# Altium PCB 四轴.PcbDoc
Units mil, origin at the board's own origin, x right, y up, seen from the top; angles counter-clockwise.
Board outline 3934.83 x 3935.71 mil, 2 copper layers (Top Layer, Bottom Layer); 73 components, 53 nets, 246 pads, 41 vias.
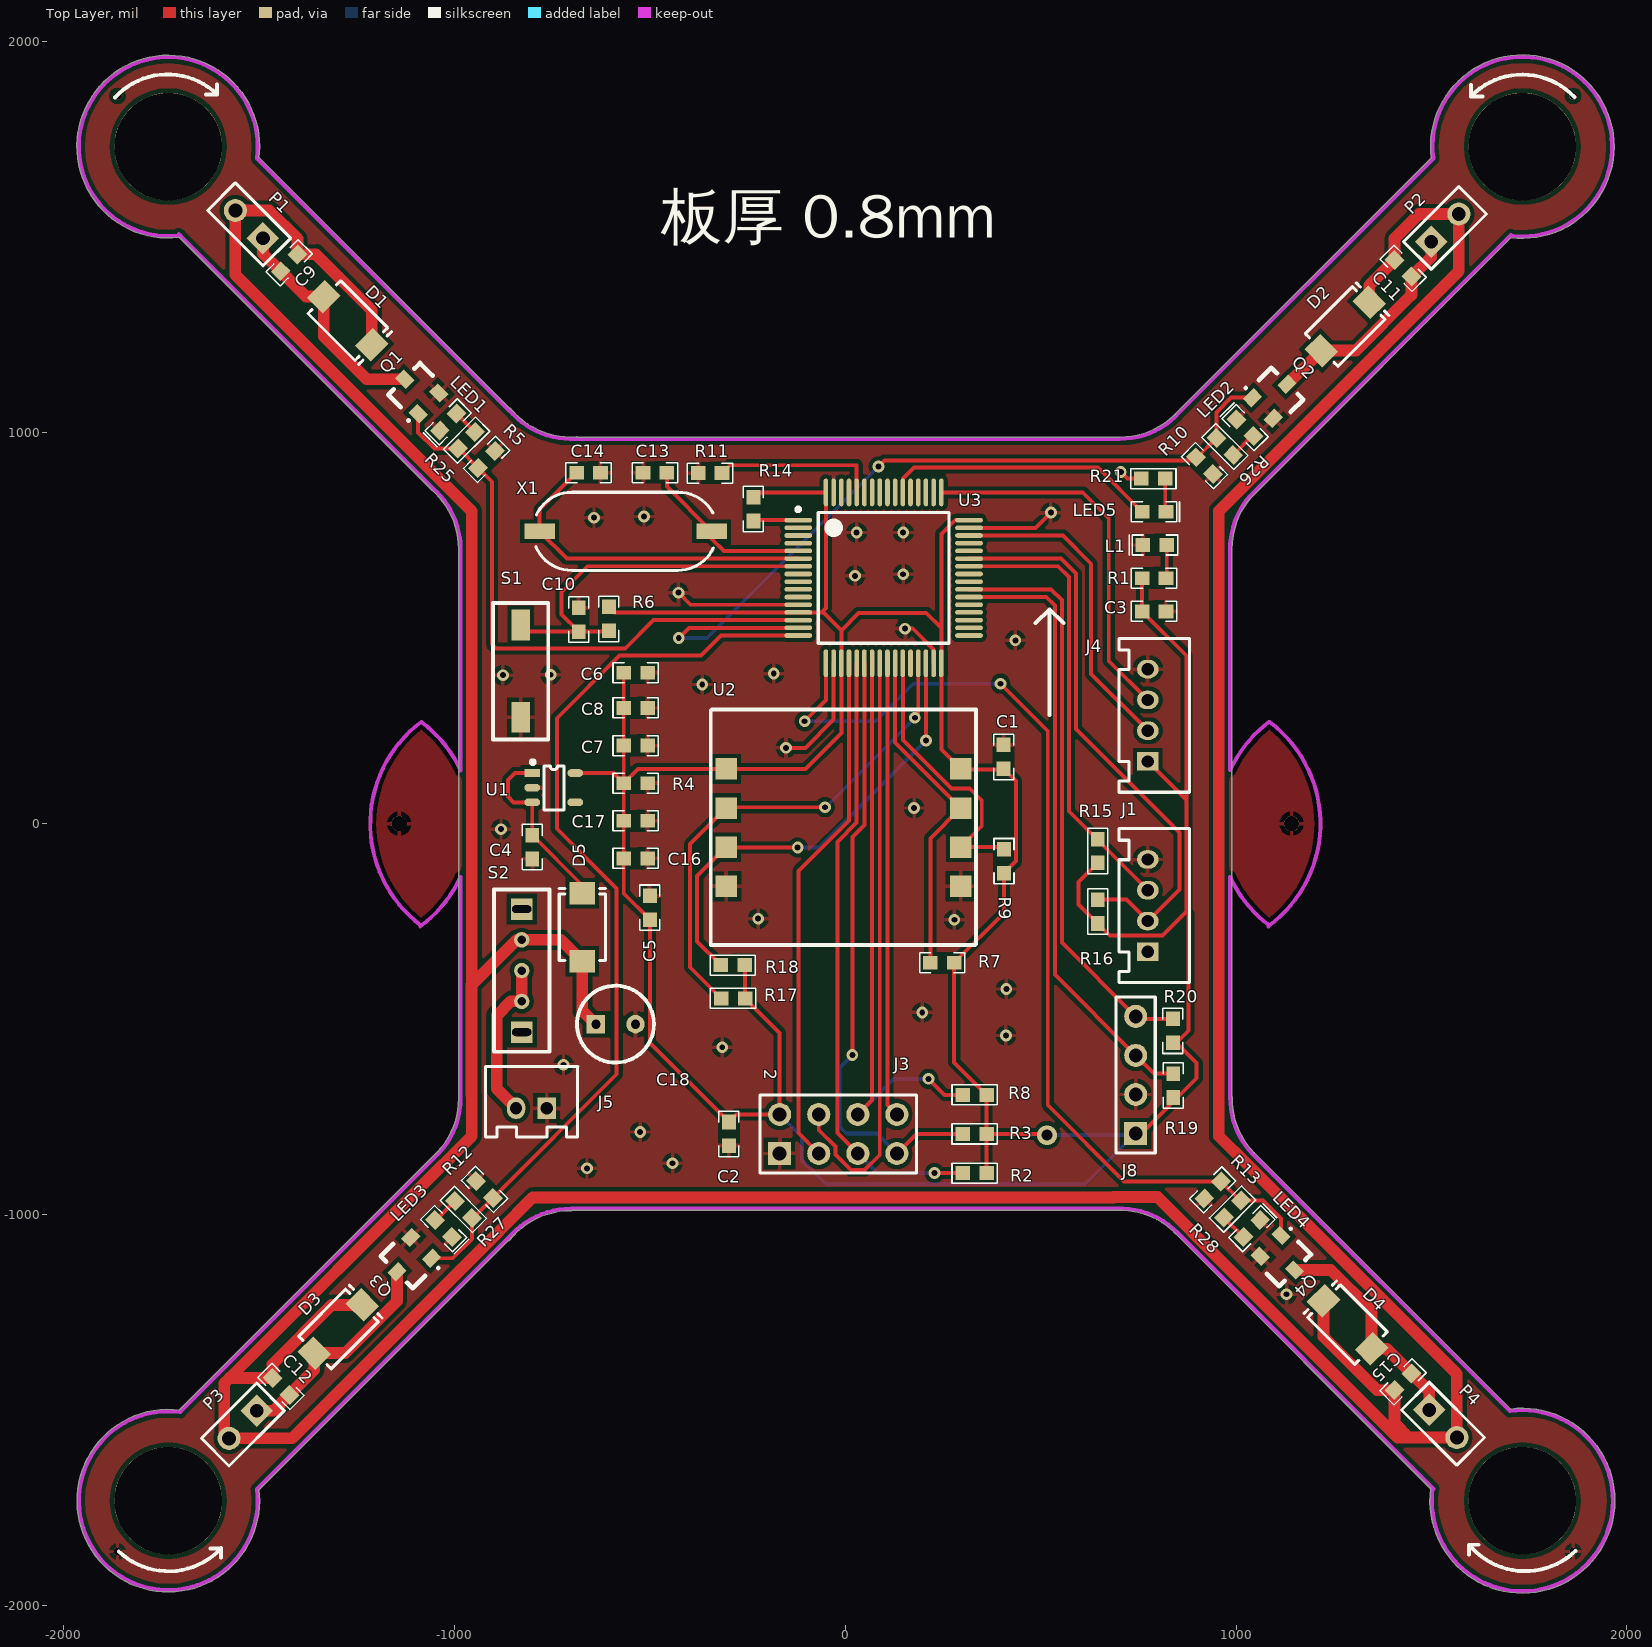
[diagram p0: Top Layer view]
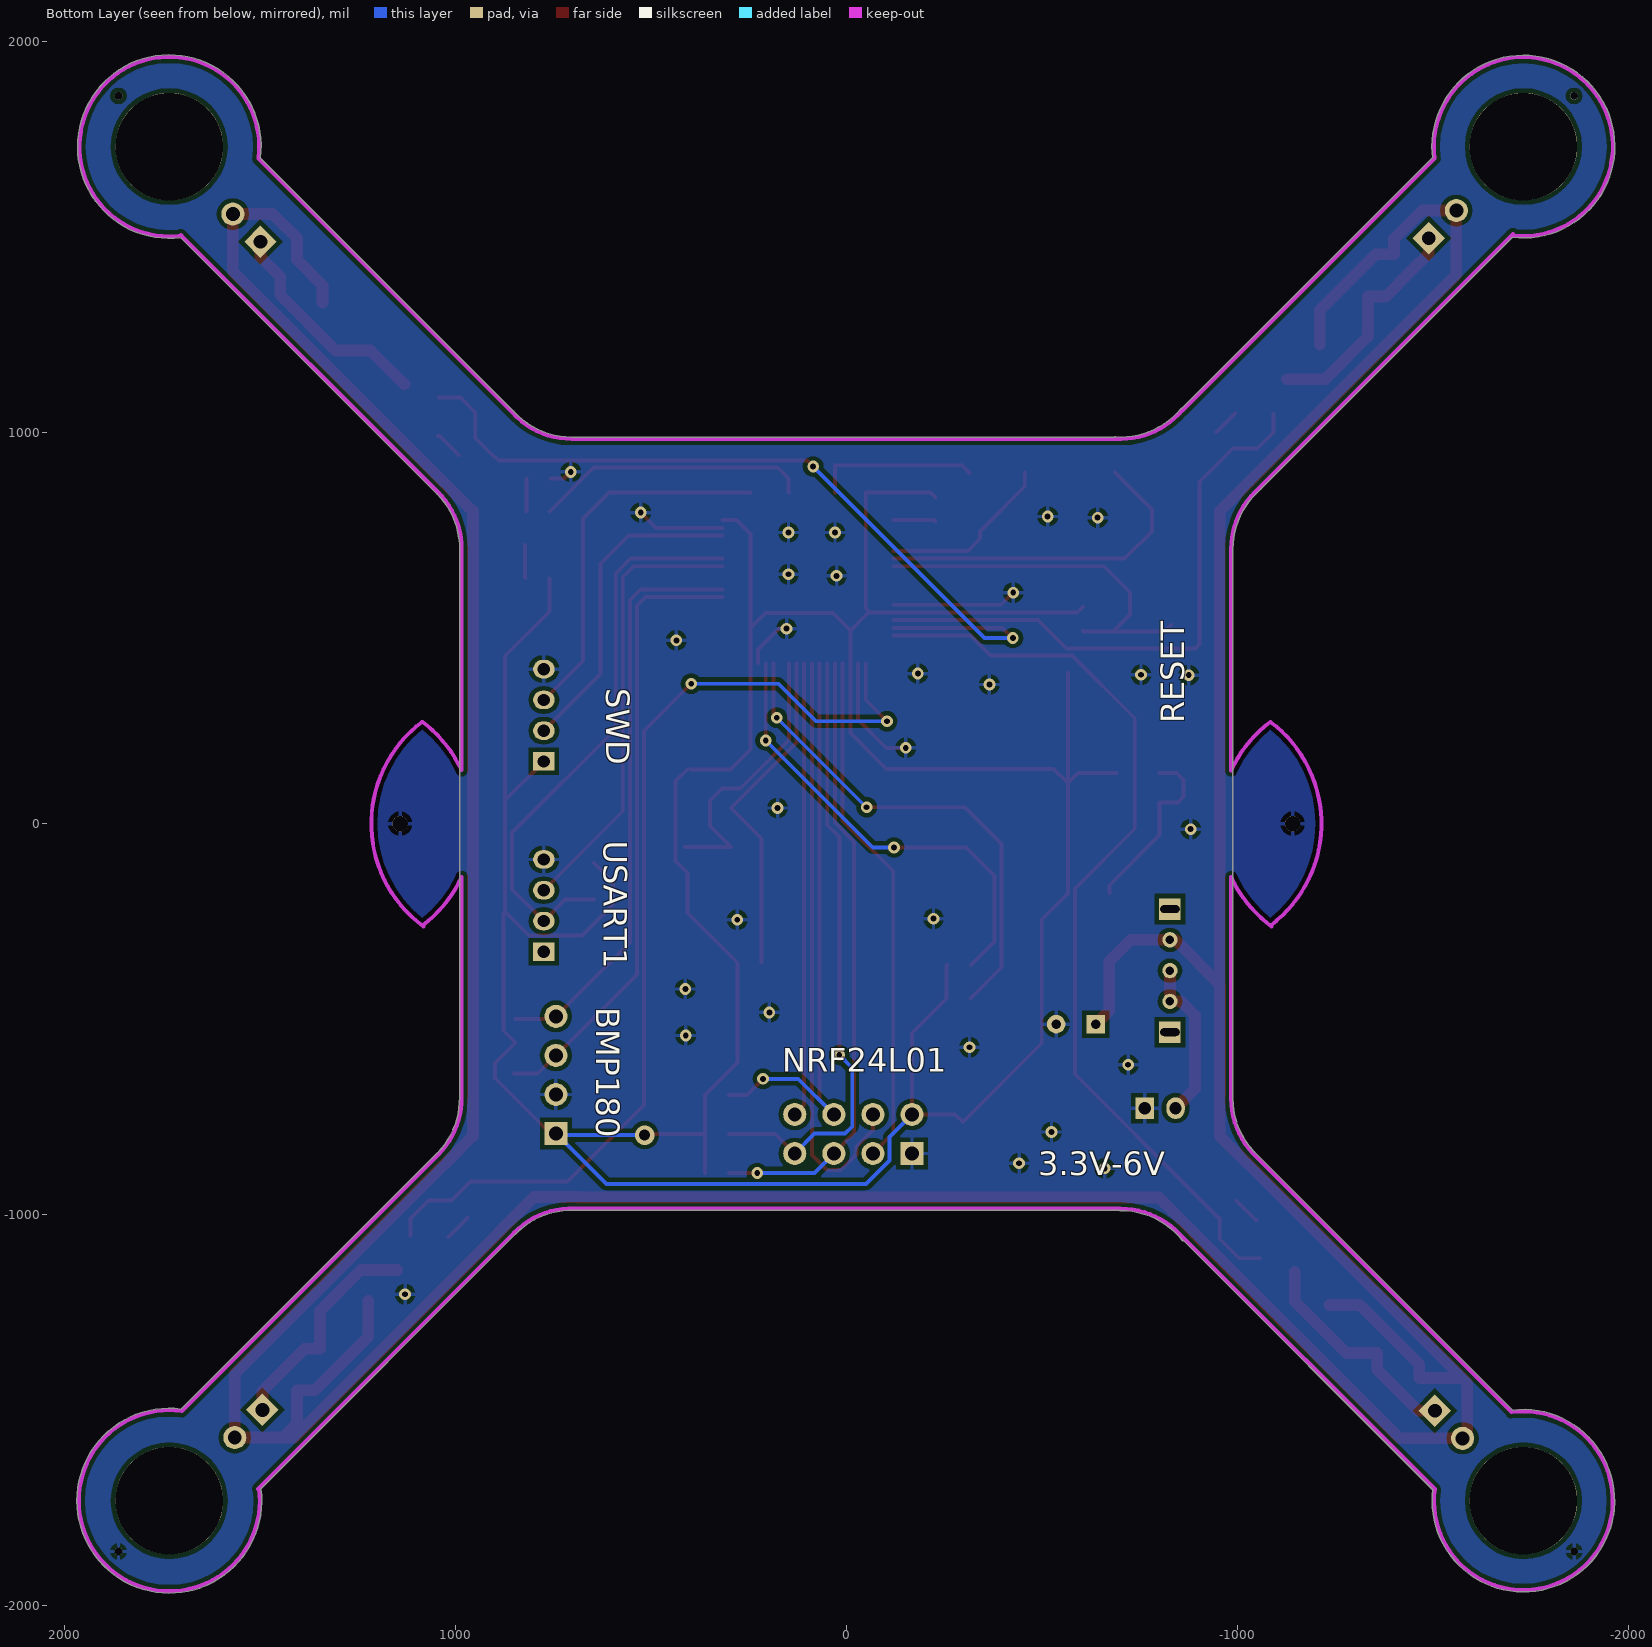
[diagram p1: Bottom Layer view, seen from below]

## Layer stack, top to bottom
Top Layer: signal copper 1.4
Dielectric: dielectric 12.6, FR-4, Dk 4.8
Bottom Layer: signal copper 1.4

## Board outline
-1704.43,-1500.49 ccw(c-1732.28,-1732.28) -1498.82,-1732.28 ccw(c-1732.28,-1732.28) -1500.49,-1704.43 -863.68,-1067.62 ccw(c-863.35,-1062.62) -859.42,-1065.74 cw(c-703,-1190) -701.87,-990.23 ccw(c-701.84,-985.22) -698.89,-989.27 694.09,-989.27 ccw(c695,-984.34) 695.19,-989.35 cw(c702.76,-1188.98) 845.4,-1049.11 ccw(c849.73,-1046.58) 846.18,-1050.12 1497.81,-1701.75 ccw(c1732.28,-1732.28) 1968.74,-1732.28 ccw(c1732.28,-1732.28) 1701.75,-1497.81 1046.71,-842.77 ccw(c1043.17,-846.32) 1046.19,-842.32 cw(c1189.37,-703) 989.62,-700.17 ccw(c984.6,-700.1) 989.62,-700.1 ccw(c984.6,-700.1) 989.27,-698.26 989.27,702 ccw(c984.25,702) 989.23,702.63 cw(c1189,703) 1047.32,843.84 ccw(c1045.26,848.41) 1048.81,844.87 1703.32,1499.38 ccw(c1732.28,1732.28) 1966.99,1732.28 ccw(c1732.28,1732.28) 1499.38,1703.32 851.27,1055.21 ccw(c854.44,1051.33) 850.73,1054.7 cw(c702.83,1189) 702.38,989.23 ccw(c701.75,984.25) 701.75,989.27 -686.39,989.27 ccw(c-688.35,984.65) -688.68,989.65 cw(c-702.09,1188.98) -855.74,1061.31 ccw(c-859.6,1058.11) -859.16,1063.1 -1500.16,1704.1 ccw(c-1732.28,1732.28) -1498.45,1732.28 ccw(c-1732.28,1732.28) -1704.1,1500.16 -1060.79,856.85 ccw(c-1056.08,858.56) -1059.33,854.75 cw(c-1188.98,702.76) -989.21,703.71 ccw(c-984.25,702.92) -989.27,702.92 -989.27,-703 ccw(c-984.25,-703) -989.23,-703.62 cw(c-1189,-703) -1043.06,-839.42 ccw(c-1040.69,-843.84) -1044.24,-840.3

## Design rules (kind name [scope] priority, off if disabled: settings)
Clearance Clearance_1 [InPolygon] p1: gap=11
Clearance mcu [InComponent('U3')] p2: gap=7
Clearance [All] p3: gap=8
ComponentClearance [All] p1: gap=0 collisioncheckmode=3 verticalgap=0 showdistances=TRUE
HoleSize [All] p1: absolutevalues=TRUE maxlimit=300 minlimit=8 maxpercent=80.000 minpercent=20.000
MinimumSolderMaskSliver [All] p1: minsoldermaskwidth=5
PolygonConnect [All] p1: connectstyle=Relief reliefconductorwidth=10 reliefentries=4 polygonreliefangle="90 Angle"
RoutingVias [All] p1: holewidth=15 width=30 viastyle="Through Hole" minholewidth=5 minwidth=10 maxholewidth=40 maxwidth=50
SilkToSilkClearance [All] p1: silktosilkclearance=7
SilkscreenOverComponentPads [All] p1: minsilkscreentomaskgap=5
SolderMaskExpansion [All] p1: expansion=4
Width [All] p1: maxlimit=50 minlimit=10 preferedwidth=10
23 further rules are at their usual default settings.

## Components (designator, comment, footprint, x,y, rotation, side; value= is the part's Value field where it differs from the comment)
C1 "0.1uF" 0603 405,171 r90 top
C2 "0.1uF" 0603 -298,-794 r270 top
C3 "0.1uF" 0603 790.11,543 r0 top
C4 "1uF" 0603 -801,-60 r90 top
C5 "10uF" 0603 -500,-215 r90 top
C6 "0.1uF" 0603 -536.28,386 r0 top
C7 "0.1uF" 0603 -536.28,199.75 r180 top
C8 "0.1uF" 0603 -536.28,296 r180 top
C9 "0.1uF" 0603 -1423,1435 r45 top
C10 "0.1uF" 0603 -682,522 r90 top
C11 "0.1uF" 0603 1427,1421 r135 top
C12 "0.1uF" 0603 -1444,-1440 r135 top
C13 "20pF" 0603 -487,898 r0 top
C14 "20pF" 0603 -657,898 r180 top
C15 "0.1uF" 0603 1427,-1428 r225 top
C16 "1uF" 0603 -536.28,-89 r180 top
C17 "0.1uF" 0603 -536.28,7.25 r180 top
C18 "100uF" CAP_5X8_2.5 -588,-513 r180 top
D1 "SS14" SMA -1273,1287 r315 top
D2 "SS14" SMA 1279,1272 r45 top
D3 "SS14" SMA -1297,-1293 r45 top
D4 "SS14" SMA 1285,-1282 r135 top
D5 "SS14" SMA -673,-265 r90 top
J1 "PH2.0-4P" PH2.0-4P 774,-131 r90 top
J3 "Header 4X2" HDR2X4 -168,-844 r0 top
J4 "PH2.0-4P" PH2.0-4P 774,356 r90 top
J5 "Header 2" PH2.0-2P -803,-728 r180 top
J8 "PH2.0-4P" HDR1X4 743,-793 r90 top
L1 "LED" 0603_LED 792,713 r180 top
LED1 "LED-Y" 0603_LED -1016,1028 r225 top
LED2 "LED-Y" 0603_LED 1023,1013 r135 top
LED3 "LED-Y" 0603_LED -1028,-1036 r315 top
LED4 "LED-Y" 0603_LED 1040,-1036 r45 top
LED5 "LED-Y" 0603_LED 790.11,798 r0 top
P1 "Header 2" HDR1X2 -1490,1498 r135 top
P2 "Header 2" HDR1X2 1499,1489 r45 top
P3 "Header 2" HDR1X2 -1506,-1502 r225 top
P4 "Header 2" HDR1X2 1494,-1500 r315 top
Q1 "AO3400" SOT-23 -1097,1106 r135 top
Q2 "AO3400" SOT-23 1099,1094 r45 top
Q3 "AO3400" SOT-23 -1116,-1116 r225 top
Q4 "AO3400" SOT-23 1119,-1111 r315 top
R1 "1K" 0603 790.11,628 r180 top
R2 "10K" C0603_M1608 331,-894 r180 top
R3 "10K" C0603_M1608 331,-794 r180 top
R4 "1K" 0603 -536.28,103.5 r180 top
R5 "10K" 0603 -918,932 r225 top
R6 "10K" 0603 -605,524 r270 top
R7 "10K" 0603 248,-356 r180 top
R8 "10K" C0603_M1608 331,-694 r180 top
R9 "10K" 0603 406,-96 r90 top
R10 "10K" 0603 919,916 r135 top
R11 "10K" 0603 -346,897 r180 top
R12 "10K" 0603 -923,-936 r315 top
R13 "10K" 0603 940,-937 r45 top
R14 "0R" 0603 -235,805 r270 top
R15 "10K" C0603_M1608 646,-70 r90 top
R16 "10K" C0603_M1608 646,-225 r90 top
R17 "10K" C0603_M1608 -287,-447 r0 top
R18 "10K" C0603_M1608 -288,-362 r0 top
R19 "10K" 0603 839,-670 r90 top
R20 "10K" 0603 838,-530 r90 top
R21 "1K" C0603_M1608 788,883 r0 top
R25 "1K" C0603_M1608 -969,981 r225 top
R26 "1K" C0603_M1608 971,965 r135 top
R27 "1K" C0603_M1608 -977,-987 r315 top
R28 "1K" C0603_M1608 991,-986 r45 top
S1 "SW-PB" SW-KEY -760,548 r270 top
S2 "SS12D07" SS-12D07 -828,-376 r270 top
U1 "XC6503D331" SOT23-5 -746,92 r0 top
U2 "MPU6050S" MPU6050S -305,140 r0 top
U3 "STM32F103RCT6" LQFP64_N 98,629 r0 top
X1 "8M" HC-49SMD -562,748 r0 top

## Footprints (in the part's own frame and the unit in brackets; to place one, negate y for a bottom-side part, rotate by r counter-clockwise, add the part's x,y. Pads: shape width x height; smd on the part's side, far side on the other; paste and mask are expansions set on the pad)
0603 [mm]
  rect 0.95x0.9 smd: 1(-0.775,0) 2(0.775,0)
  silkscreen extent -1.48,-0.65 1.47,0.65
0603_LED [mm]
  rect 0.95x0.9 smd: 1(-0.775,0) 2(0.775,0)
  silkscreen extent -1.48,-0.65 1.65,0.65
C0603_M1608 [mm] "Chip Capacitor, 2-L"
  rect 0.95x0.9 smd: 1(-0.775,0) 2(0.775,0)
  silkscreen extent -1.48,-0.65 1.48,0.65
CAP_5X8_2.5 [mm]
  rect 1.2x1.2 hole 0.6: 1(1.275,0)
  round 1.2 hole 0.6: 2(-1.3,0)
  silkscreen extent -2.5,-2.5 2.5,2.5
HC-49SMD [mm]
  rect 2x1 smd: 1(-5.588,0) 2(5.588,0)
  silkscreen extent -5.84,-2.54 5.7,2.54
HDR1X2 [mm] "Connector; He"
  rect 1.5x1.5 hole 0.9: 1(0,0)
  round 1.5 hole 0.9: 2(2.54,0)
  silkscreen extent -1.27,-1.27 3.81,1.27
HDR1X4 [mm] "Connecto"
  rect 1.5x1.5 hole 0.9: 1(0,0)
  round 1.5 hole 0.9: 2(2.54,0) 3(5.08,0) 4(7.62,0)
  silkscreen extent -1.27,-1.27 8.89,1.27
HDR2X4 [mm] "Connector; Head"
  rect 1.5x1.5 hole 0.9: 1(0,0)
  round 1.5 hole 0.9: 2(0,2.54) 3(2.54,0) 4(2.54,2.54) 5(5.08,0) 6(5.08,2.54) 7(7.62,0) 8(7.62,2.54)
  silkscreen extent -1.27,-1.27 8.89,3.81
LQFP64_N [mm]
  oval 1.8x0.3 smd: 1(-5.55,3.75) 2(-5.55,3.25) 3(-5.55,2.75) 4(-5.55,2.25) 5(-5.55,1.75) 6(-5.55,1.25) 7(-5.55,0.75) 8(-5.55,0.25) 9(-5.55,-0.25) 10(-5.55,-0.75) 11(-5.55,-1.25) 12(-5.55,-1.75) 13(-5.55,-2.25) 14(-5.55,-2.75) 15(-5.55,-3.25) 16(-5.55,-3.75) 33(5.55,-3.75) 34(5.55,-3.25) 35(5.55,-2.75) 36(5.55,-2.25) 37(5.55,-1.75) 38(5.55,-1.25) 39(5.55,-0.75) 40(5.55,-0.25) 41(5.55,0.25) 42(5.55,0.75) 43(5.55,1.25) 44(5.55,1.75) 45(5.55,2.25) 46(5.55,2.75) 47(5.55,3.25) 48(5.55,3.75)
  oval 0.3x1.8 smd: 17(-3.75,-5.55) 18(-3.25,-5.55) 19(-2.75,-5.55) 20(-2.25,-5.55) 21(-1.75,-5.55) 22(-1.25,-5.55) 23(-0.75,-5.55) 24(-0.25,-5.55) 25(0.25,-5.55) 26(0.75,-5.55) 27(1.25,-5.55) 28(1.75,-5.55) 29(2.25,-5.55) 30(2.75,-5.55) 31(3.25,-5.55) 32(3.75,-5.55) 49(3.75,5.55) 50(3.25,5.55) 51(2.75,5.55) 52(2.25,5.55) 53(1.75,5.55) 54(1.25,5.55) 55(0.75,5.55) 56(0.25,5.55) 57(-0.25,5.55) 58(-0.75,5.55) 59(-1.25,5.55) 60(-1.75,5.55) 61(-2.25,5.55) 62(-2.75,5.55) 63(-3.25,5.55) 64(-3.75,5.55)
  silkscreen extent -5.67,-4.25 4.25,4.57, body extent -5,-5 5,5, height 1.6
MPU6050S [mm]
  rect 1.4x1.4 smd: 1(0,0) 2(0,-2.54) 3(0,-5.08) 4(0,-7.62) 5(15.24,0) 6(15.24,-2.54) 7(15.24,-5.08) 8(15.24,-7.62)
  silkscreen extent -1,-11.43 16.25,3.88
PH2.0-2P [mm]
  rect 1.2x1.4 hole 0.8: 1(-1,0)
  oval 1.2x1.4 hole 0.8: 2(1,0)
  silkscreen extent -3.01,-2.72 3,1.88
PH2.0-4P [mm]
  rect 1.2x1.4 hole 0.8: 1(-5,0)
  oval 1.2x1.4 hole 0.8: 2(-3,0) 3(-1,0) 4(1,0)
  silkscreen extent -7.01,-2.72 3,1.88
SMA [mm]
  rect 1.45x1.65 smd: 1(-2.21,0) 2(2.21,0)
  silkscreen extent -2.16,-1.5 2.51,1.5
SOT23-5 [mil] "SOT23, 5-Leads, Body 3.1x3.0mm (max), Pit"
  rect 40x20 smd: 1(-55,37.4)
  oval 40x20 smd: 2(-55,0) 3(-55,-37.4) 4(55,-37.4) 5(55,37.4)
  silkscreen extent -59,-57 26,70
SOT-23 [mm]
  rect 1x0.8 smd: 1(-1.1,0.952) 2(-1.1,-0.952) 3(1.1,-0.013)
  silkscreen extent -0.97,-1.46 1.14,1.71
SS-12D07 [mm]
  round 1 hole 0.55: 1(-2,0) 2(0,0) 3(2,0)
  rect 1.4x1.4 hole 0.5 slot 1.25 at 90 deg: ""(-4,0) ""(4,0)
  silkscreen extent -5.28,-1.8 5.28,1.8
SW-KEY [mm]
  rect 2x1.2 smd: 1(1,-1.8) 2(7,-1.8)
  silkscreen extent -0.43,-3.6 8.45,0

## Part data
C1 C2 C3 C4 C5 C6 C7 C8 C9 C10 C11 C12 C13 C14 C15 C16 C17: library part Cap, "C"
J1 J4: library part "Header 4", "Heade"
J3: "Header, 4-Pin, Dual row"
J5: "Heade"
J8: library part "Header 4", "Header, 4-Pin"
P1 P2 P3 P4: "Header, 2-Pin"
R1 R4 R5 R6 R7 R9 R10 R11 R12 R13 R14 R19 R20: library part Res1
R2 R3 R8 R15 R16 R17 R18 R21 R25 R26 R27 R28: library part Res, "电阻0603"
S1: library part SW-
U1: library part XC6503Dxxx
U3: "256K Flash 48"

## Free pads (board coordinates)
  round 275.59 hole 275.59: 0(-1732.28,-1732.28) 0(-1732.28,1732.28) 0(1732.28,-1732.28) 0(1732.28,1732.28)
  round 39.37 hole 39.37: 0(-1141.73,0) 0(1141.73,0)
  round 19.68 hole 19.68: 1(-1862.2,-1862.2) 1(-1862.2,1862.2) 1(1862.2,-1862.2) 1(1862.2,1862.2)

## Via types
v1: diameter 30, hole 15, Top Layer to Bottom Layer, tented both sides, 26 vias
v2: diameter 30, hole 15, Top Layer to Bottom Layer, 14 vias
v3: diameter 50, hole 28, Top Layer to Bottom Layer, tented both sides, 1 vias

## Nets (pads, with @x,y where several pads share a name; then routed paths per layer and width w, separated by ;. In a path a pad name is that pad's centre, name@x,y a point inside that pad or via, vN(x,y) a via of type N, cw(c..) or ccw(c..) an arc to the next point about the centre after c; other vN are vias at no path point)
BMP180_SCL: J8.3 R19.2 U3.38 | length 1591.5
  Top Layer w10: U3.38 514.21,579.79 536,558 536,-386 J8.3 789.49,-639.49 R19.2@850,-639.49
BMP180_SDA: J8.4 R20.2 U3.39 | length 1498.8
  Top Layer w10: U3.39 526.53,599.47 554,572 554,-304 J8.4 749.49,-499.49 R20.2@847,-499.49
BOOT0: R11.1 U3.60 | length 422.4
  Top Layer w10: R11.1 -295.49,917 29.1,917 U3.60
ESP_CH_PD: U3.40
ESP_GP0: U3.2
ESP_GP2: U3.3
ESP_GP16: U3.4
ESP_URXD: U3.51
ESP_UTXD: U3.52
GND: C1.2 C2.2 C3.2 C4.1 C5.2 C6.2 C7.1 C8.1 C10.2 C13.1 C14.1 C16.1 C17.1 C18.2 J1.4 J3.1 J4.4 J5.1 J8.2 L1.2 LED1.2 LED2.2 LED3.2 LED4.2 pad.0@1141.73,0 pad.0@-1141.73,0 pad.1@1862.2,-1862.2 pad.1@-1862.2,-1862.2 Q1.2 Q2.2 Q3.2 Q4.2 R4.1 R5.1 R10.1 R11.2 R12.1 R13.1 R21.1 S1.2 U1.2 U2.4 U2.8 U3.12 U3.18 U3.31 U3.47 U3.63 | length 1031
  Top Layer w10: v1(-427,591) -396.1,560.1 U3.12 ; v1(-152,194) -102,194 -29.95,266.05 U3.18 ; v1(153,499) 172.61,499 225.95,445.66 U3.31 ; U3.47 486.95,756.95 v1(526,796) ; v1(705,900) 722,883 R21.1
  other v1: 1129,-1204 411,-542 412,-423 279,-246 -223,-243 -881,-14 -876,380 -754,381 -643,783 -515,786
  other v2: -661,-882 -442,-869 -525,-789 -721,-617 -315,-572 197,-483 176,40 -366,356 -183,384 435,469 25,634 148,638 29,745 148,745
HC-RX: U3.53
M1_PWM: Q1.1 R5.2 R25.2 U3.14 | length 1523.1
  Top Layer w10: Q1.1 -1092.89,1000.89 -1051.42,959.42 R25.2 -988.58,959.42 R5.2 -904,874.85 -904,459 -893,448 -563,448 -490.27,520.73 U3.14
M2_PWM: Q2.1 R10.2 R26.2 U3.15 | length 2077.4
  Top Layer w10: v1(-426,475) -399.95,501.05 U3.15 ; v1(85,914) 100,929 888.85,929 R10.2 900.43,937.58 R26.2 949.42,1052.42 986.89,1089.89 Q2.1
  Bottom Layer w10: v1(-426,475) -354,475 v1(85,914)
M3_PWM: Q3.1 R12.2 R27.2 U3.16 | length 2379.7
  Top Layer w10: Q3.1 -1004.89,-1111.89 -955.42,-1062.42 R27.2 -952.42,-1008.58 R12.2 -585,-641.15 -585,-166 -738,-13 -738,269.59 -577.59,430 -369,430 -317.64,481.36 U3.16
M4_PWM: Q4.1 R13.2 R28.2 U3.17 | length 2600.8
  Top Layer w10: v1(-104,262) -49.64,316.36 U3.17 ; v1(397,358) 518,237 518,-720 713.42,-915.42 R13.2 1010.58,-964.42 R28.2 1069.42,-964.42 1114.89,-1009.89 Q4.1
  Bottom Layer w10: v1(-104,262) 78,262 174,358 v1(397,358)
MPU6050_RX: R17.1 U2.2 U3.29 | length 1288.8
  Top Layer w10: R17.1 -397,-367.51 -397,-52 U2.2 -303,42 v1(-52,42) ; v1@178,262 v1(178,271) 186.58,279.58 U3.29
  Bottom Layer w10: v1(-52,42) -51,42 v1(178,271)
MPU6050_SCL: R7.2 U2.6 U3.26 | length 868
  Top Layer w10: U3.26 127.53,207.47 U2.6 217.49,-37.51 R7.2
MPU6050_SDA: R9.2 U2.7 U3.27 | length 722.5
  Top Layer w10: U3.27 147.21,214.28 271.5,90 318.5,90 349,59.5 349,-6 U2.7 R9.2@413.49,-60
MPU6050_TX: R18.1 U2.3 U3.30 | length 1180.5
  Top Layer w10: R18.1 -379,-301.51 -379,-134 U2.3 -304,-61 v1(-122,-61) ; v1(206.27,212.73) U3.30
  Bottom Layer w10: v1(-122,-61) -67.46,-61 v1(206.27,212.73)
NetC4_2: C4.2 D5.2 U1.1 U1.3 | length 460.6
  Top Layer w10: U1.3@-806.13,54.6 -848.6,54.6 -863,69 -863,111.8 -845.4,129.4 U1.1 ; U1.3 C4.2 -673,-157.49 D5.2
NetC9_1: C9.1 D1.1 P1.1 Q1.3 | length 595
  Top Layer w30: P1.1 -1490,1458.85 C9.1 -1379.67,1348.52 D1.1 -1334.52,1246.52 -1224.98,1136.98 Q1.3
NetC11_1: C11.1 D2.1 P2.1 Q2.3 | length 570.5
  Top Layer w30: Q2.3 1131.27,1124.27 D2.1 1306.48,1210.48 1448.58,1352.58 C11.1 1499,1449.85 P2.1
NetC12_1: C12.1 D3.1 P3.1 Q3.3 | length 575.7
  Top Layer w30: P3.1 -1462.85,-1502 C12.1 -1358.52,-1397.67 D3.1 -1280.06,-1354.52 -1146.98,-1221.44 Q3.3
NetC13_2: C13.2 U3.5 X1.2 | length 450.8
  Top Layer w10: C13.2 -456.49,862.49 X1.2 -342,729 -310.9,697.9 U3.5
NetC14_2: C14.2 U3.6 X1.1 | length 879.5
  Top Layer w10: C14.2 -782,803.51 X1.1 -712.21,678.21 U3.6
NetC15_1: C15.1 D4.1 P4.1 Q4.3 | length 578.1
  Top Layer w30: Q4.3 1241.98,-1141.98 1346.52,-1246.52 D4.1 1385.67,-1343.52 C15.1 1494,-1451.85 P4.1
NetJ5_2: J5.2 S2.2 S2.3 | length 415.3
  Top Layer w30: J5.2 -892,-678.37 -892,-491 -855.74,-454.74 S2.3 S2.2
NetL1_1: L1.1 R1.1 | length 85.8
  Top Layer w10: R1.1 822.51,629.89 L1.1
NetLED1_1: LED1.1 R25.1 | length 66.5
  Top Layer w10: LED1.1 R25.1
NetLED2_1: LED2.1 R26.1 | length 71.9
  Top Layer w10: R26.1 1040.58,991.42 LED2.1
NetLED3_1: LED3.1 R27.1 | length 71.3
  Top Layer w10: LED3.1 -1047.58,-1014.42 R27.1
NetLED4_1: LED4.1 R28.1 | length 70.3
  Top Layer w10: R28.1 969.42,-1008.58 LED4.1
NetLED5_1: LED5.1 U3.54 | length 706.1
  Top Layer w10: U3.54 148,848.29 148,883.46 175.54,911 646.6,911 LED5.1
NetLED5_2: LED5.2 R21.2 | length 85.9
  Top Layer w10: R21.2 818.51,800.11 LED5.2
NetR14_2: R14.2 U3.1 | length 108.8
  Top Layer w10: R14.2@-228,773.49 -224.85,776.64 U3.1
NRF_CE: J3.3 U3.20 | length 1329.6
  Top Layer w10: J3.3 -120,-792 -120,-121 9.42,8.42 U3.20
NRF_CSN: J3.4 U3.24 | length 1524.9
  Top Layer w10: J3.4 -68,-783.86 -25.47,-826.38 -25.47,-846.67 14.38,-886.53 49.62,-886.53 88.16,-847.99 U3.24
NRF_IRQ: J3.8 U3.25 | length 1164.5
  Top Layer w10: U3.25 107.84,-719.84 J3.8
NRF_MISO: J3.7 R3.2 U3.22 | length 1576.7
  Top Layer w10: v1(18,-592) 18,-33.91 48.79,-3.12 U3.22 ; J3.7 182,-794 R3.2
  Bottom Layer w10: v1(18,-592) -15,-625 -15,-775 3,-793 81,-793 J3.7
NRF_MOSI: J3.6 R8.2 U3.23 | length 1492.8
  Top Layer w10: J3.6 68.47,-707.53 U3.23 ; v1(213,-653) 254,-694 R8.2
  Bottom Layer w10: J3.6 123,-653 v1(213,-653)
NRF_SCK: J3.5 R2.2 U3.21 | length 1585.6
  Top Layer w10: U3.21 29.1,2.65 -20,-46.46 -20,-792 J3.5 ; v1(228,-894) R2.2
  Bottom Layer w10: J3.5 82,-894 v1(228,-894)
OLED_CS: U3.33
OLED_D0_SCK: U3.34
OLED_D1_MOSI: U3.36
OLED_DC: U3.37
OLED_RES: U3.35
RST: C10.1 R6.2 S1.1 U3.7 | length 985.6
  Top Layer w10: S1.1 -813.72,491.49 C10.1 ; R6.2 -607,491.49 C10.1 ; U3.7 -659.47,658.53 -726,592 -726,535.49 C10.1
SWCLK: J4.3 U3.49 | length 961.7
  Top Layer w10: U3.49 607.5,847.5 674,781 674,416.63 J4.3
SWDIO: J4.2 U3.46 | length 829.6
  Top Layer w10: U3.46 556.73,737.27 629,665 629,382.89 J4.2
UART1RX: J1.2 R16.2 U3.43 | length 1472.4
  Top Layer w10: U3.43 551.79,678.21 590,640 590,242 855,-23 855,-168.11 J1.2 719.38,-194.49 R16.2
UART1TX: J1.3 R15.2 U3.42 | length 1151.9
  Top Layer w10: U3.42 544.47,658.53 572,631 572,31.63 J1.3
VCC-3.3V: C1.1 C2.1 C3.1 C5.1 C6.1 C7.2 C8.2 C16.2 C17.2 J3.2 J4.1 J8.1 R1.2 R2.1 R3.1 R4.2 R6.1 R7.1 R8.1 R9.1 R14.1 R15.1 R16.1 R17.2 R18.2 R19.1 R20.1 U1.5 U2.1 U2.5 U3.13 U3.19 U3.32 U3.48 U3.64 | length 9818.9
  Top Layer w10: U1.5 -592.69,129.4 R4.2 ; R6.1 -590.91,540.42 U3.13 -60.8,540.42 ; C6.1 R4.2 ; R18.2 -256.49,-363 R17.2 -168,-535.49 J3.2 -278.51,-744 C2.1 -500,-561.49 C5.1 -566.79,-178.72 C16.2 R4.2 ; R14.1@-228,834.51 -215.01,847.5 U3.64 -49.64,551.58 -60.8,540.42 ; 245.64,500.36 207,539 34,539 -10.27,494.73 ; U3.48 281.34,776.64 245.64,740.94 U3.32 245.64,189.36 U2.5 296.49,138.51 C1.1@398,138.51 ; R2.1 R3.1 ; C1.1 436.72,108.77 436.72,-95.8 R9.1 406,-228.51 R7.1 278.51,-611 R8.1 R3.1 ; v3(516,-797) 513,-794 R3.1 ; R15.1 597,-149.51 597,-206.51 R16.1 676.49,-286 812,-286 873,-225 ; J8.1 757.51,-793 899,-651.51 899,-612.51 847,-560.51 877.72,-529.8 877.72,-229.72 873,-225 ; R1.2 C3.1 873,429.6 873,60.15 ; J4.1 873,60.15 ; R4.2 -530.29,140 U2.1 -102,140 -10.27,231.73 U3.19 -10.27,494.73 ; -60.8,540.42 -55.95,540.42 -10.27,494.73 ; 873,-225 873,60.15
  Bottom Layer w10: J3.2 -110.53,-801.47 -110.53,-861.62 -50.14,-922 614,-922 J8.1@739,-797 ; v3(516,-797) J8.1@739,-797 ; J8.1 J8.1@739,-797
VCC-5V: C9.2 C11.2 C12.2 C15.2 C18.1 D1.2 D2.2 D3.2 D4.2 D5.1 P1.2 P2.2 P3.2 P4.2 S2.1 | length 13331.8
  Top Layer w30: D3.2 -1313.94,-1231.48 -1465.58,-1383.11 C12.2 -1575.68,-1418.42 ; D1.2 -1211.48,1313.48 -1354.58,1456.58 C9.2 -1401.42,1496.42 -1473.71,1568.71 P1.2 -1560.71,1404.72 -955.48,799.49 -955.48,-411.74 ; C18.1 -673,-478.2 D5.1 -727.74,-297.26 S2.1 -841,-297.26 -955.48,-411.74 ; D4.2 1223.48,-1312.48 1360.58,-1449.58 C15.2 1405.42,-1534.14 1442,-1570.71 ; D2.2 1340.52,1377.67 C11.2 1405.42,1497.42 1467.71,1559.71 P2.2 1569.71,1413.94 955.49,799.72 955.49,-799.1 1029.13,-872.73 1029.98,-872.73 1564.71,-1407.46 P4.2 1442,-1570.71 ; -1575.68,-1418.42 -1027.65,-870.4 -1026.51,-870.4 -955.49,-799.38 -955.49,-694.42 -956.25,-693.66 -956.25,-412.51 -955.48,-411.74 ; -1575.68,-1418.42 -1588.71,-1431.46 -1588.71,-1560.71 P3.2 -1415.46,-1572.71 -885.39,-1042.64 -885.39,-1042.16 -799.48,-956.25 685.79,-956.25 686.57,-955.47 799.48,-955.47 886.37,-1042.36 886.37,-1043.63 1413.46,-1570.71 1442,-1570.71
pads on no net: J1.1 S2. U1.4 U3.8 U3.9 U3.10 U3.11 U3.28 U3.41 U3.44 U3.45 U3.50 U3.55 U3.56 U3.57 U3.58 U3.59 U3.61 U3.62

## Polygon pours and split planes (outlines as drawn)
GND on Top Layer "Bottom Layer-No Net" (solid, remove dead copper, pour order 4): -2297,2140 -2288,2131 -2288,-2342 2522,-2342 2602,-2262 2318,-1978 2318,2078
GND on Bottom Layer "Bottom Layer-No Net" (solid, remove dead copper, pour order 6): -2464,2395 -2464,-2031 -2216,-2279 -2209,-2272 2420,-2272 2420,2417 2428,2425

## Keep-outs
Keep-Out Layer:
  lines w10: -1705.43,1508.57 -1055.75,858.9 ; -1702.05,-1505.2 -1040.69,-843.84 ; -1701.3,-1505.95 ccw(c-1732.28,-1732.28) -1505.72,-1702.99 ; -1701.23,1505.59 cw(c-1732.28,1732.28) -1505.44,1702.32 -860.43,1057.28 ; -1505.93,-1702.78 -840.07,-1036.93 ; -1087.67,-262.64 ccw(c-1280,0) -984.62,-136.83 ; -1085.75,-260.42 cw(c-890,-0.32) -1084.9,260.41 ; -1084.66,260.41 cw(c-1280,0) -984.24,136 -984.25,702.92 ; -1056.08,858.56 cw(c-1188.98,702.76) -984.19,702.92 ; -1040.51,-844.03 ccw(c-1189,-703) -984.21,-703 ; -984.25,-700 -984.25,-136.83 ; -863.35,-1062.62 cw(c-703,-1190) -701.84,-985.22 ; -859.6,1058.11 ccw(c-702.09,1188.98) -688.35,984.65 ; -700.88,-984.25 695,-984.25 ; -688.35,984.25 701.75,984.25 ; 695,-984.34 cw(c702.76,-1188.98) 849.83,-1046.47 ; 701.75,984.22 ccw(c702.83,1189) 854.44,1051.33 ; 849.73,-1046.58 1505.07,-1701.93 ; 854.46,1051.31 1504.57,1701.43 ; 984.21,702 cw(c1189,703) 1045.03,848.64 ; 984.25,-700.1 984.25,-136.42 ; 984.25,136.73 984.25,702 ; 984.43,-136.42 ccw(c1280,0) 1084.25,-260.1 ; 984.58,136.73 cw(c1280,0) 1085.1,260.73 ; 984.6,-700.1 ccw(c1189.37,-703) 1043.13,-846.36 ; 1043.17,-846.32 1700.18,-1503.33 ; 1045.26,848.41 1702.93,1506.07 ; 1082.33,-262.64 ccw(c890,0) 1085.34,260.41 ; 1503.04,-1700.46 ccw(c1732.28,-1732.28) 1700.46,-1503.04 ; 1504.48,1702.94 cw(c1732.28,1732.28) 1701.55,1504.66

## Silkscreen, mask and mechanical layers (free items; w line width, h text height)
Top Overlay:
  lines w10: -1868.33,1858.11 cw(c-1734.06,1735.25) -1607.46,1866 ; -1859,-1862 ccw(c-1732.03,-1728.96) -1597,-1853.81 ; -1636,1866 -1607.46,1866 ; -1624.38,-1854.3 -1597.49,-1854.3 -1597,-1853.81 ; -1607.46,1891.54 -1607.46,1866 ; 487,513 522,548 522,278 ; 523,548 558,513 ; 1596.06,-1870.66 1596.06,-1845 ; 1600.51,1890.51 1600.51,1861 ; 1620,-1845 1596.06,-1845 ; 1631,1861 1600.51,1861 ; 1865.42,1859.25 ccw(c1732.13,1733.13) 1600.51,1861 ; 1868.24,-1860.86 cw(c1739.51,-1726.51) 1596.06,-1845 ; -1597,-1853.81 -1597,-1877.93 -1597,-1853.81
  text "板厚 0.8mm" at -471,1461 h196.85
Bottom Overlay:
  text "SWD" at 614,347 h60 r90
  text "RESET" at -864,257 h60 r270
  text "USART1" at 621,-44 h60 r90
  text "BMP180" at 640,-470 h60 r90
  text "NRF24L01" at 164,-635 h60
  text "3.3V-6V" at -491,-900 h60
Drill Drawing:
  text ".LEGEND" at 130.31,-2406.25 h31.5
  text "100 * 100 mm" at -1152.69,-2434.25 h31.5
  text "Drill Drawing." at 135.31,-2536.25 h31.5

## Text inside footprints (layer, text, board x,y; h text height)
J3: Top Overlay "2" at -208,-629 h31.5 r270